# EAGLE board led_slave_1x2 (EAGLE 6.1)
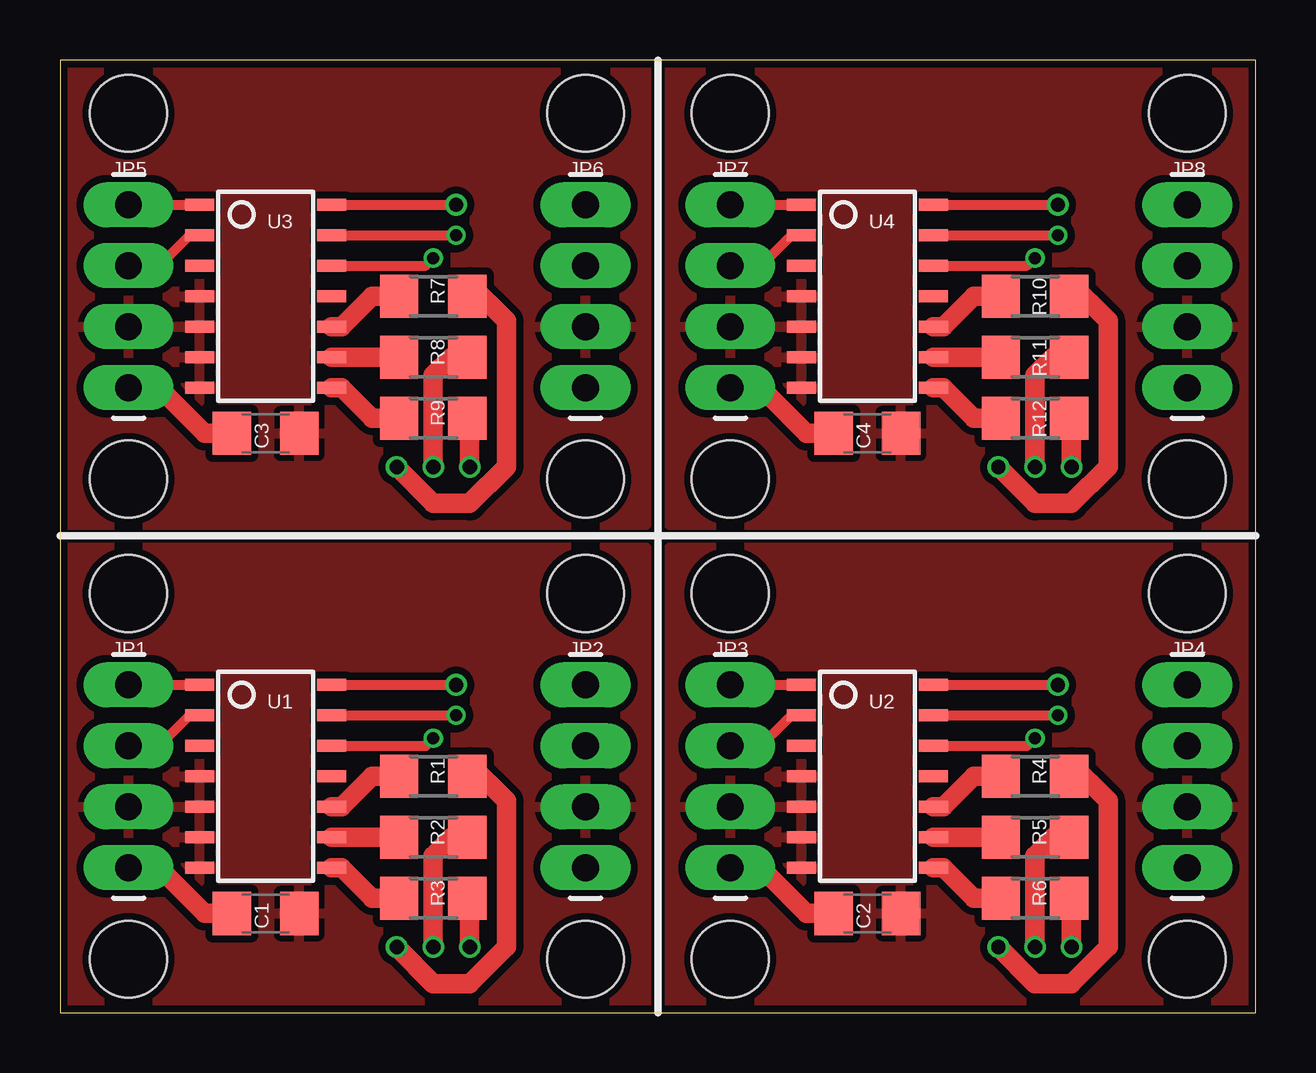
[diagram p0: board, top side]
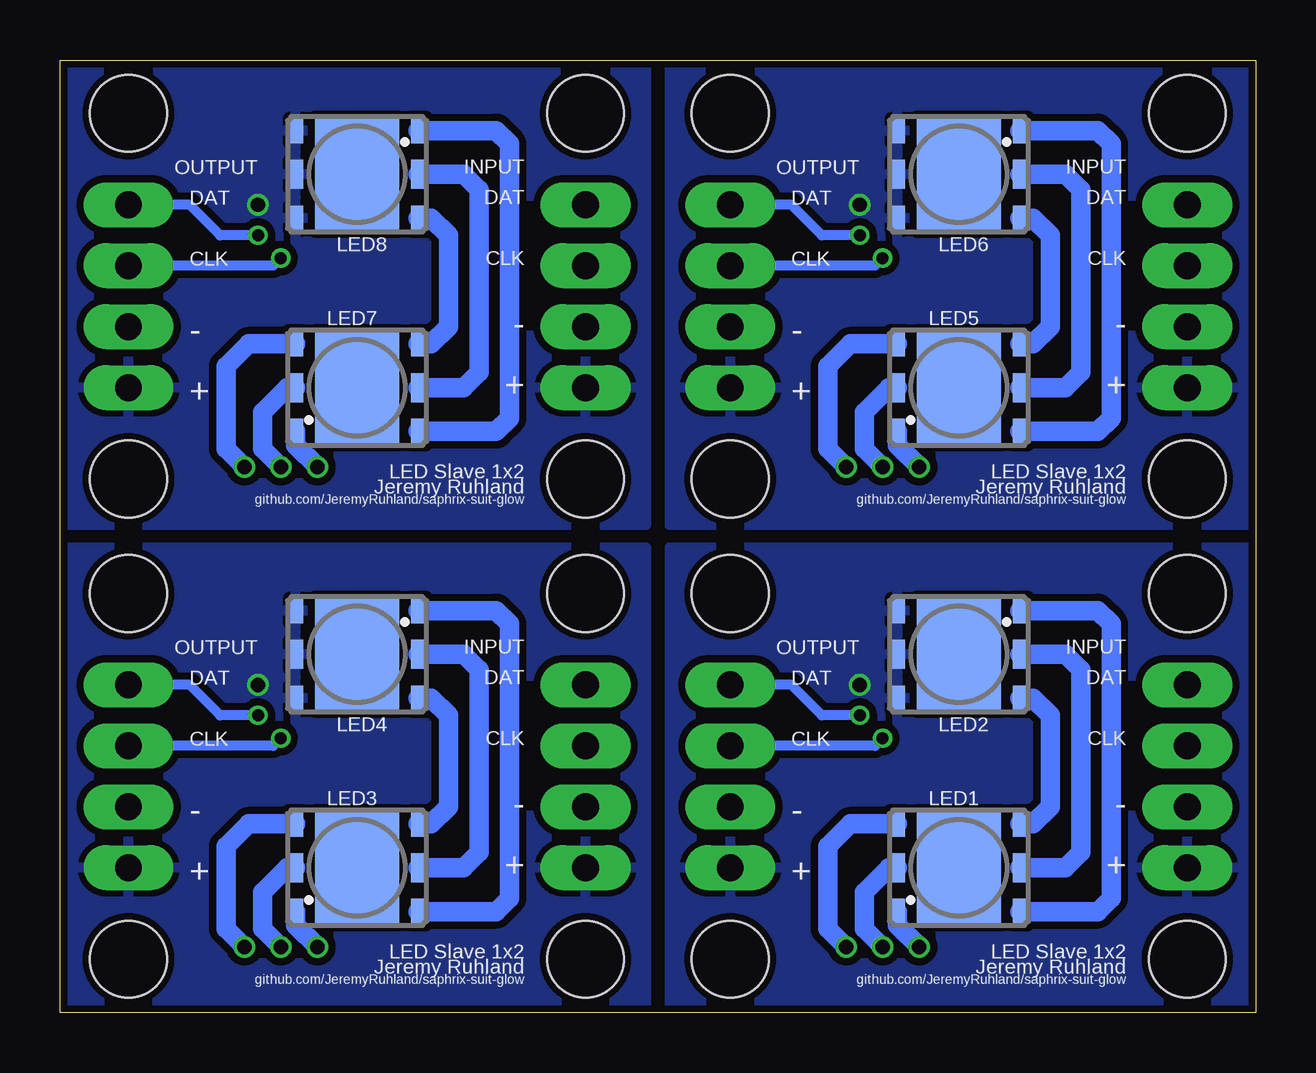
[diagram p1: board, bottom side, seen from below]

Size 49.85 x 39.69 mm. Coordinates in mm from the lower left corner, seen from the top.
Outline: 49.85,39.69 0,39.69 0,0 49.85,0 49.85,39.69
Copper layers (1*16): Top 0.035mm / dielectric 1.5mm / Bottom 0.035mm
Design rules: minimum track width 6mil, minimum drill 12mil, track to track 6mil, track to pad 6mil, pad to pad 6mil, via to via 6mil, smd to smd 0mil, copper to edge 10mil, drill to drill 10mil, minimum pad ring 10mil, minimum via ring 6mil, stop-mask expansion 2mil, vias tented up to drill 100mil, thermal gap 10mil
Holes 3.2 mm at 2.86,17.46 2.86,2.22 21.91,2.22 21.91,17.46 27.94,17.46 27.94,2.22 46.99,2.22 46.99,17.46 2.86,37.47 2.86,22.23 21.91,22.23 21.91,37.47 27.94,37.47 27.94,22.23 46.99,22.23 46.99,37.47

## Footprints (pad centres in the part's own frame; a part is rotated, then mirrored left to right if it is on the bottom)
C1206 = smd 1.6 x 1.8: 1 -1.4,0; 2 1.4,0
1X04_LONGPADS = drill 1.118 pad 1.88 long: 1 0,0; 2 2.54,0; 3 5.08,0; 4 7.62,0
F50360 = smd 0.6 x 1.05: BA 2.55,1.825; BC -2.55,1.825; RA 2.55,-1.825; RC -2.55,-1.825 | smd 0.6 x 1.2: GA 2.55,0; GC -2.55,0 | smd 3.5 x 4.7: NC 0,0
R1206 = smd 1.6 x 1.803: 1 -1.422,0; 2 1.422,0
SOP-14 = smd 0.5 x 1.2: 1 -3.81,-2.75; 2 -2.54,-2.75; 3 -1.27,-2.75; 4 0,-2.75; 5 1.27,-2.75; 6 2.54,-2.75; 7 3.81,-2.75; 8 3.81,2.75; 9 2.54,2.75; 10 1.27,2.75; 11 0,2.75; 12 -1.27,2.75; 13 -2.54,2.75; 14 -3.81,2.75

## Placement (x,y rotation side)
C1  [C1206]  8.57,4.13 0 top
C2  [C1206]  33.66,4.13 0 top
C3  [C1206]  8.57,24.13 0 top
C4  [C1206]  33.66,24.13 0 top
JP1  [1X04_LONGPADS]  2.86,6.03 90 top
JP2  [1X04_LONGPADS]  21.91,6.03 90 top
JP3  [1X04_LONGPADS]  27.94,6.03 90 top
JP4  [1X04_LONGPADS]  46.99,6.03 90 top
JP5  [1X04_LONGPADS]  2.86,26.04 90 top
JP6  [1X04_LONGPADS]  21.91,26.04 90 top
JP7  [1X04_LONGPADS]  27.94,26.04 90 top
JP8  [1X04_LONGPADS]  46.99,26.04 90 top
LED1  F50360  [F50360]  12.38,6.03 0 bottom
LED2  F50360  [F50360]  12.38,14.92 180 bottom
LED3  F50360  [F50360]  37.47,6.03 0 bottom
LED4  F50360  [F50360]  37.47,14.92 180 bottom
LED5  F50360  [F50360]  12.38,26.04 0 bottom
LED6  F50360  [F50360]  12.38,34.92 180 bottom
LED7  F50360  [F50360]  37.47,26.04 0 bottom
LED8  F50360  [F50360]  37.47,34.92 180 bottom
R1  [R1206]  15.56,9.84 180 top
R2  [R1206]  15.56,7.3 180 top
R3  [R1206]  15.56,4.76 180 top
R4  [R1206]  40.64,9.84 180 top
R5  [R1206]  40.64,7.3 180 top
R6  [R1206]  40.64,4.76 180 top
R7  [R1206]  15.56,29.84 180 top
R8  [R1206]  15.56,27.3 180 top
R9  [R1206]  15.56,24.77 180 top
R10  [R1206]  40.64,29.84 180 top
R11  [R1206]  40.64,27.3 180 top
R12  [R1206]  40.64,24.77 180 top
U1  WS2801  [SOP-14]  8.57,9.84 270 top
U2  WS2801  [SOP-14]  33.66,9.84 270 top
U3  WS2801  [SOP-14]  8.57,29.84 270 top
U4  WS2801  [SOP-14]  33.66,29.84 270 top

## Library data of the parts
C1-C4 R1-R12 = adafruit
JP1-JP8 U1-U4 = sparkfun
LED1-LED8 = led

## Nets
N$1: JP1.3 U1.2
N$2: JP1.4 U1.1
N$3: JP2.4 U1.13
N$4: JP2.3 U1.12
N$5: R1.2 U1.10
N$6: R2.2 U1.9
N$7: R3.2 U1.8
N$8: JP4.4 U2.13
N$9: JP4.3 U2.12
N$10: LED3.BA LED4.BC
N$11: LED1.BC R3.1
N$12: LED1.GC R2.1
N$13: LED3.GA LED4.GC
N$14: LED3.RA LED4.RC
N$15: LED1.BA LED2.BC
N$16: LED1.GA LED2.GC
N$17: LED1.RA LED2.RC
N$18: R4.2 U2.10
N$19: R5.2 U2.9
N$20: R6.2 U2.8
N$21: LED1.RC R1.1
N$22: LED3.BC R6.1
N$23: LED3.GC R5.1
N$24: LED3.RC R4.1
N$25: JP3.3 U2.2
N$26: C1.1 JP1.1 JP2.1 LED2.BA LED2.GA LED2.RA U1.14
N$27: C1.2 JP1.2 JP2.2 U1.4 U1.5 U1.6 U1.7
N$28: JP3.4 U2.1
N$29: C2.1 JP3.1 JP4.1 LED4.BA LED4.GA LED4.RA U2.14
N$30: C2.2 JP3.2 JP4.2 U2.4 U2.5 U2.6 U2.7
N$33: JP6.4 U3.13
N$34: JP6.3 U3.12
N$35: LED5.BA LED6.BC
N$36: LED5.GA LED6.GC
N$37: LED5.RA LED6.RC
N$38: R7.2 U3.10
N$39: R8.2 U3.9
N$40: R9.2 U3.8
N$41: LED5.BC R9.1
N$42: LED5.GC R8.1
N$43: LED5.RC R7.1
N$44: JP5.3 U3.2
N$45: JP5.4 U3.1
N$46: C3.1 JP5.1 JP6.1 LED6.BA LED6.GA LED6.RA U3.14
N$47: C3.2 JP5.2 JP6.2 U3.4 U3.5 U3.6 U3.7
N$48: JP8.4 U4.13
N$50: JP8.3 U4.12
N$51: LED7.BA LED8.BC
N$52: LED7.GA LED8.GC
N$53: LED7.RA LED8.RC
N$54: R10.2 U4.10
N$55: R11.2 U4.9
N$56: R12.2 U4.8
N$57: LED7.BC R12.1
N$58: LED7.GC R11.1
N$59: LED7.RC R10.1
N$60: JP7.3 U4.2
N$61: JP7.4 U4.1
N$62: C4.1 JP7.1 JP8.1 LED8.BA LED8.GA LED8.RA U4.14
N$63: C4.2 JP7.2 JP8.2 U4.4 U4.5 U4.6 U4.7

## Tracks (layer width: path | path; a pad name or v marks a point on that pad's centre or on a via)
N$1
  Top 0.406: U1.2 5.4,12.38 4.13,11.11 JP1.3
N$2
  Top 0.406: JP1.4 U1.1
N$3  (via drill 0.5)
  Top 0.406: U1.13 v16.51,12.38
  Bottom 0.406: v16.51,12.38 18.1,12.38 19.37,13.65 JP2.4
N$4  (via drill 0.5)
  Top 0.406: U1.12 15.24,11.11 v15.56,11.43
  Bottom 0.406: v15.56,11.43 15.88,11.11 JP2.3
N$5
  Top 0.813: U1.10 11.75,8.57 13.02,9.84 R1.2
N$6
  Top 0.813: U1.9 R2.2
N$7
  Top 0.813: U1.8 11.75,6.03 13.02,4.76 R3.2
N$8  (via drill 0.5)
  Top 0.406: U2.13 v41.59,12.38
  Bottom 0.406: v41.59,12.38 43.18,12.38 44.45,13.65 JP4.4
N$9  (via drill 0.5)
  Top 0.406: U2.12 40.32,11.11 v40.64,11.43
  Bottom 0.406: v40.64,11.43 40.96,11.11 JP4.3
N$10
  Bottom 0.813: LED4.BC 34.37,13.1 33.66,12.38 33.66,8.57 34.37,7.86 LED3.BA
N$11  (via drill 0.6)
  Top 0.813: v17.08,2.73 17.08,4.25 R3.1
  Bottom 0.813: v17.08,2.73 17.84,3.49 17.84,6.92 16.91,7.86 LED1.BC
N$12  (via drill 0.6)
  Top 0.813: v15.56,2.73 15.56,6.54 16.32,7.3 R2.1
  Bottom 0.813: v15.56,2.73 16.32,3.49 16.32,5.02 15.3,6.03 LED1.GC
N$13
  Bottom 0.813: LED3.GA 33.02,6.03 32.38,6.67 32.38,14.29 33.02,14.92 LED4.GC
N$14
  Bottom 0.813: LED3.RA 31.67,4.21 31.11,4.76 31.11,16.19 31.67,16.75 LED4.RC
N$15
  Bottom 0.813: LED2.BC 9.29,13.1 8.57,12.38 8.57,8.57 9.29,7.86 LED1.BA
N$16
  Bottom 0.813: LED1.GA 7.94,6.03 7.3,6.67 7.3,14.29 7.94,14.92 LED2.GC
N$17
  Bottom 0.813: LED1.RA 6.59,4.21 6.03,4.76 6.03,16.19 6.59,16.75 LED2.RC
N$18
  Top 0.813: U2.10 36.83,8.57 38.1,9.84 R4.2
N$19
  Top 0.813: U2.9 R5.2
N$20
  Top 0.813: U2.8 36.83,6.03 38.1,4.76 R6.2
N$21  (via drill 0.6)
  Top 0.813: v14.03,2.73 15.56,1.21 17.08,1.21 18.61,2.73 18.61,8.83 17.08,10.35 R1.1
  Bottom 0.813: v14.03,2.73 14.93,3.63 LED1.RC
N$22  (via drill 0.6)
  Top 0.813: v42.16,2.73 42.16,4.25 R6.1
  Bottom 0.813: v42.16,2.73 42.93,3.49 42.93,6.92 41.99,7.86 LED3.BC
N$23  (via drill 0.6)
  Top 0.813: v40.64,2.73 40.64,6.54 41.4,7.3 R5.1
  Bottom 0.813: v40.64,2.73 41.4,3.49 41.4,5.02 40.39,6.03 LED3.GC
N$24  (via drill 0.6)
  Top 0.813: v39.12,2.73 40.64,1.21 42.16,1.21 43.69,2.73 43.69,8.83 42.16,10.35 R4.1
  Bottom 0.813: v39.12,2.73 40.02,3.63 LED3.RC
N$25
  Top 0.406: U2.2 30.48,12.38 29.21,11.11 JP3.3
N$26  (via drill 0.6)
  Top 0.406: U1.14 v16.51,13.65
  Top 0.813: C1.1 6.03,4.13 4.13,6.03 JP1.1
  pour Bottom (isolate 0.305): 0.32,19.37 24.45,19.37 24.45,0.32 0.32,0.32
N$27
  pour Top (isolate 0.305, rank 2): 0.32,0.32 24.45,0.32 24.45,19.37 0.32,19.37
N$28
  Top 0.406: JP3.4 U2.1
N$29  (via drill 0.6)
  Top 0.406: U2.14 v41.59,13.65
  Top 0.813: C2.1 31.11,4.13 29.21,6.03 JP3.1
  pour Bottom (isolate 0.305): 25.4,19.37 49.53,19.37 49.53,0.32 25.4,0.32
N$30
  pour Top (isolate 0.305, rank 2): 25.4,0.32 49.53,0.32 49.53,19.37 25.4,19.37
N$33  (via drill 0.5)
  Top 0.406: U3.13 v16.51,32.38
  Bottom 0.406: v16.51,32.38 18.1,32.38 19.37,33.66 JP6.4
N$34  (via drill 0.5)
  Top 0.406: U3.12 15.24,31.11 v15.56,31.43
  Bottom 0.406: v15.56,31.43 15.88,31.11 JP6.3
N$35
  Bottom 0.813: LED6.BC 9.29,33.1 8.57,32.38 8.57,28.57 9.29,27.86 LED5.BA
N$36
  Bottom 0.813: LED5.GA 7.94,26.04 7.3,26.67 7.3,34.29 7.94,34.92 LED6.GC
N$37
  Bottom 0.813: LED5.RA 6.59,24.21 6.03,24.77 6.03,36.2 6.59,36.75 LED6.RC
N$38
  Top 0.813: U3.10 11.75,28.57 13.02,29.84 R7.2
N$39
  Top 0.813: U3.9 R8.2
N$40
  Top 0.813: U3.8 11.75,26.04 13.02,24.77 R9.2
N$41  (via drill 0.6)
  Top 0.813: v17.08,22.73 17.08,24.26 R9.1
  Bottom 0.813: v17.08,22.73 17.84,23.5 17.84,26.92 16.91,27.86 LED5.BC
N$42  (via drill 0.6)
  Top 0.813: v15.56,22.73 15.56,26.54 16.32,27.3 R8.1
  Bottom 0.813: v15.56,22.73 16.32,23.5 16.32,25.02 15.3,26.04 LED5.GC
N$43  (via drill 0.6)
  Top 0.813: v14.03,22.73 15.56,21.21 17.08,21.21 18.61,22.73 18.61,28.83 17.08,30.35 R7.1
  Bottom 0.813: v14.03,22.73 14.93,23.63 LED5.RC
N$44
  Top 0.406: U3.2 5.4,32.38 4.13,31.11 JP5.3
N$45
  Top 0.406: JP5.4 U3.1
N$46  (via drill 0.6)
  Top 0.406: U3.14 v16.51,33.66
  Top 0.813: C3.1 6.03,24.13 4.13,26.04 JP5.1
  pour Bottom (isolate 0.305): 0.32,39.37 24.45,39.37 24.45,20.32 0.32,20.32
N$47
  pour Top (isolate 0.305, rank 2): 0.32,20.32 24.45,20.32 24.45,39.37 0.32,39.37
N$48  (via drill 0.5)
  Top 0.406: U4.13 v41.59,32.38
  Bottom 0.406: v41.59,32.38 43.18,32.38 44.45,33.66 JP8.4
N$50  (via drill 0.5)
  Top 0.406: U4.12 40.32,31.11 v40.64,31.43
  Bottom 0.406: v40.64,31.43 40.96,31.11 JP8.3
N$51
  Bottom 0.813: LED8.BC 34.37,33.1 33.66,32.38 33.66,28.57 34.37,27.86 LED7.BA
N$52
  Bottom 0.813: LED7.GA 33.02,26.04 32.38,26.67 32.38,34.29 33.02,34.92 LED8.GC
N$53
  Bottom 0.813: LED7.RA 31.67,24.21 31.11,24.77 31.11,36.2 31.67,36.75 LED8.RC
N$54
  Top 0.813: U4.10 36.83,28.57 38.1,29.84 R10.2
N$55
  Top 0.813: U4.9 R11.2
N$56
  Top 0.813: U4.8 36.83,26.04 38.1,24.77 R12.2
N$57  (via drill 0.6)
  Top 0.813: v42.16,22.73 42.16,24.26 R12.1
  Bottom 0.813: v42.16,22.73 42.93,23.5 42.93,26.92 41.99,27.86 LED7.BC
N$58  (via drill 0.6)
  Top 0.813: v40.64,22.73 40.64,26.54 41.4,27.3 R11.1
  Bottom 0.813: v40.64,22.73 41.4,23.5 41.4,25.02 40.39,26.04 LED7.GC
N$59  (via drill 0.6)
  Top 0.813: v39.12,22.73 40.64,21.21 42.16,21.21 43.69,22.73 43.69,28.83 42.16,30.35 R10.1
  Bottom 0.813: v39.12,22.73 40.02,23.63 LED7.RC
N$60
  Top 0.406: U4.2 30.48,32.38 29.21,31.11 JP7.3
N$61
  Top 0.406: JP7.4 U4.1
N$62  (via drill 0.6)
  Top 0.406: U4.14 v41.59,33.66
  Top 0.813: C4.1 31.11,24.13 29.21,26.04 JP7.1
  pour Bottom (isolate 0.305): 25.4,39.37 49.53,39.37 49.53,20.32 25.4,20.32
N$63
  pour Top (isolate 0.305, rank 2): 25.4,20.32 49.53,20.32 49.53,39.37 25.4,39.37

## Text on the board
_bsilk: INPUT | INPUT | OUTPUT | OUTPUT | DAT | DAT | DAT | DAT | CLK | CLK | CLK | CLK | - | - | - | - | + | + | + | + | LED Slave 1x2 | LED Slave 1x2 | Jeremy Ruhland | github.com/JeremyRuhland/saphrix-suit-glow | Jeremy Ruhland | github.com/JeremyRuhland/saphrix-suit-glow | INPUT | INPUT | OUTPUT | OUTPUT | DAT | DAT | DAT | DAT | CLK | CLK | CLK | CLK | - | - | - | - | + | + | + | + | LED Slave 1x2 | LED Slave 1x2 | Jeremy Ruhland | github.com/JeremyRuhland/saphrix-suit-glow | Jeremy Ruhland | github.com/JeremyRuhland/saphrix-suit-glow